# Altium PCB PCB1AMP.CIR.PcbDoc
Units mil, origin at the board's own origin, x right, y up, seen from the top; angles counter-clockwise.
Board outline 5315 x 1720 mil, 2 copper layers (Top Layer, Bottom Layer); 6 components, 4 nets, 14 pads, 0 vias.
Unrouted connection lines stored in the file: 9.
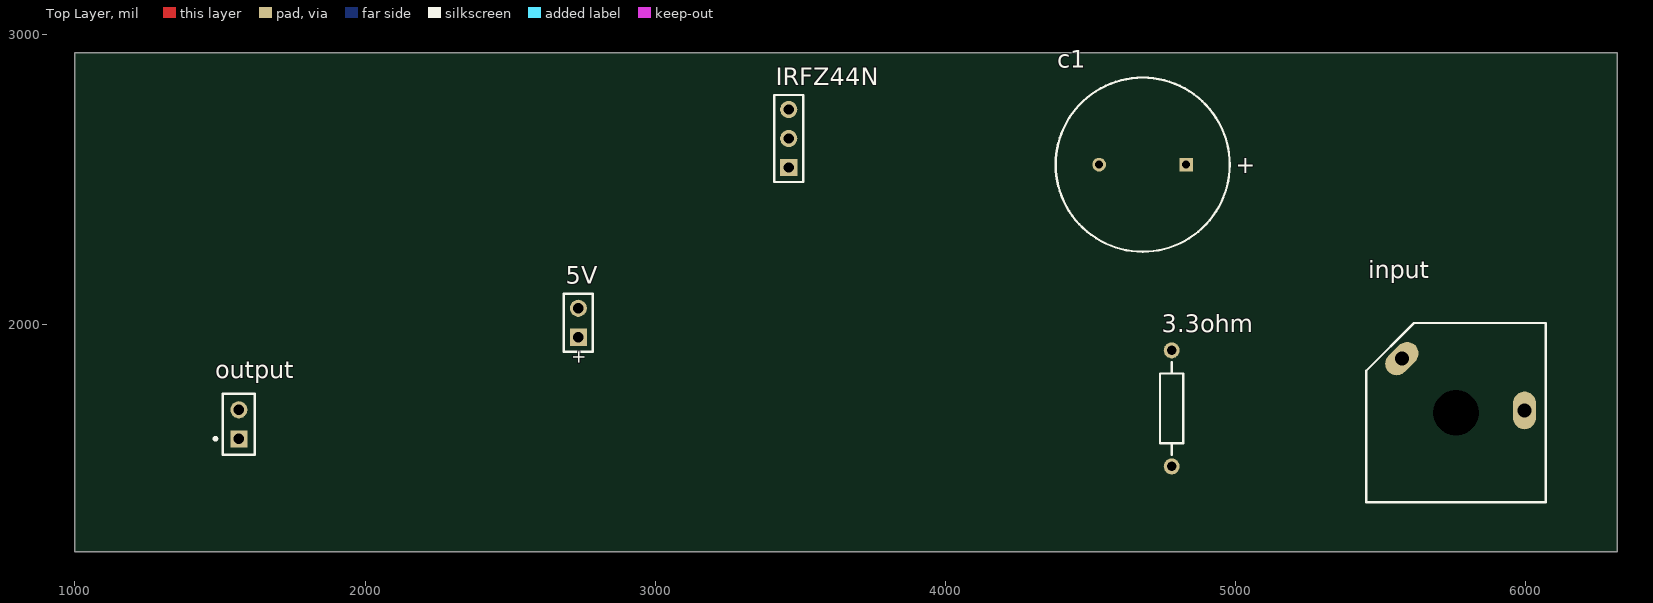
[diagram p0: Top Layer view]
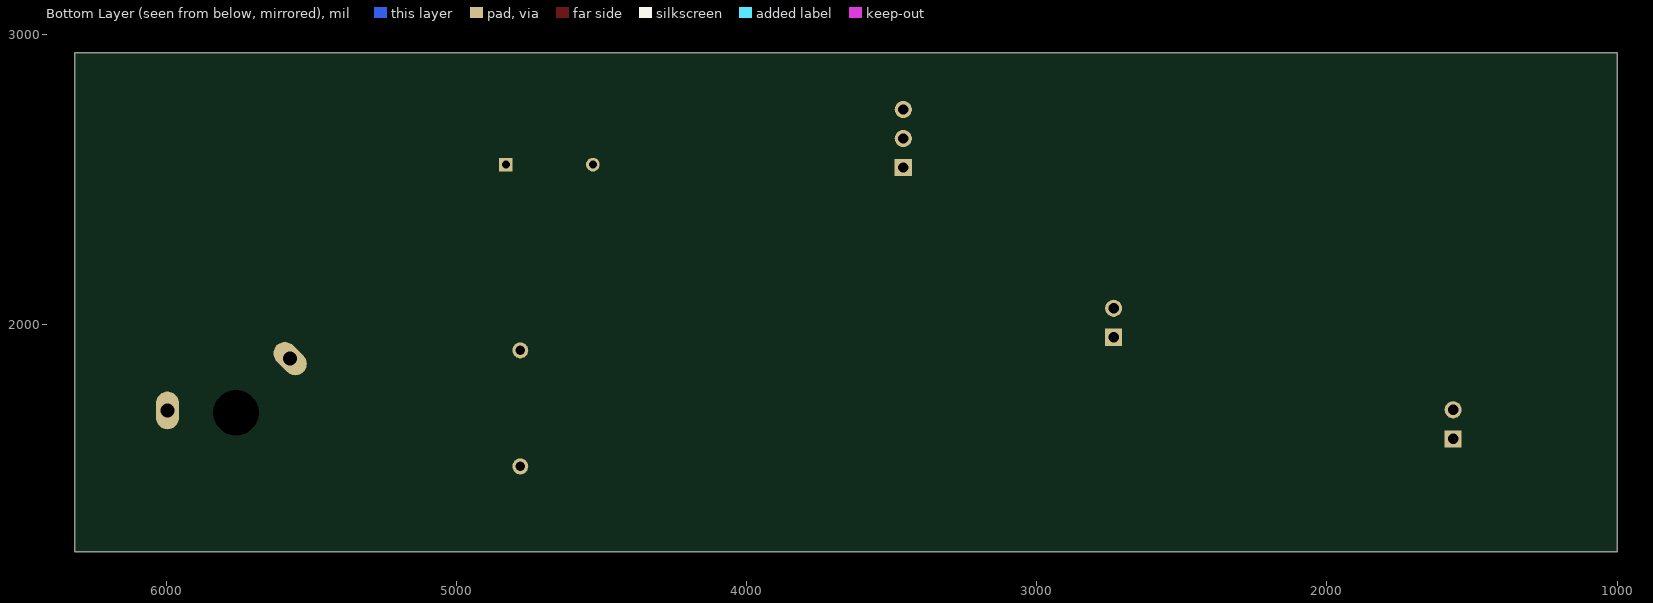
[diagram p1: Bottom Layer view, seen from below]

## Layer stack, top to bottom
Top Solder: solder mask 0.4, Solder Resist, Dk 3.5
Top Layer: signal copper 1.4
Dielectric 1: dielectric 12.6, FR-4, Dk 4.8
Bottom Layer: signal copper 1.4
Bottom Solder: solder mask 0.4, Solder Resist, Dk 3.5

## Board outline
1000,1215 6315,1215 6315,2935 1000,2935

## Design rules (kind name [scope] priority, off if disabled: settings)
Clearance [All] p1: gap=10 ignorepadtopadclearanceinfootprint=FALSE except(0: Arc-Hole Track-Hole SMDPad-Hole THPad-Hole Via-Hole Fill-Hole Poly-Hole Region-Hole Text-Hole)
PolygonConnect [All] p1: connectstyle=Relief reliefconductorwidth=10 reliefentries=4 polygonreliefangle="90 Angle" airgapwidth=10
RoutingVias [All] p1: holewidth=28 width=50 viastyle="Through Hole" minholewidth=28 minwidth=50 maxholewidth=28 maxwidth=50
SolderMaskExpansion [All] p1: expansion=4 istentingtop=FALSE
Width [All] p1: maxlimit=10 minlimit=10 preferedwidth=10
30 further rules are at their usual default settings.

## Components (designator, comment, footprint, x,y, rotation, side; value= is the part's Value field where it differs from the comment)
3.3ohm "Res1" AXIAL-0.4 4780,1710 r90 top
5V "Battery" BAT-2 2735,2005 r90 top
c1 "Cap Pol1" RB7.6-15 4680,2550 r0 top value=22mf/25v
input "Phonejack2" JACK/6-V2 5760,1695 r0 top
IRFZ44N "Header 3" HDR1X3 3460,2540 r90 top
output "Speaker" PIN2 1565,1605 r90 top

## Footprints (in the part's own frame and the unit in brackets; to place one, negate y for a bottom-side part, rotate by r counter-clockwise, add the part's x,y. Pads: shape width x height; smd on the part's side, far side on the other; paste and mask are expansions set on the pad)
AXIAL-0.4 [mm] "Axial Device, Thru-Hole; 2 Leads; 0.4 in Pin Spacing"
  round 1.4 hole 0.85: 1(-5.08,0) 2(5.08,0)
  silkscreen extent -4.06,-1.02 4.06,1.02
BAT-2 [mm] "Battery; 2 Leads"
  rect 1.5x1.5 hole 0.9: 1(-1.27,0)
  round 1.5 hole 0.9: 2(1.27,0)
  silkscreen extent -2.54,-1.27 2.54,1.27
HDR1X3 [mm] "Connector; Header; 3 Position"
  rect 1.5x1.5 hole 0.9: 1(0,0)
  round 1.5 hole 0.9: 2(2.54,0) 3(5.08,0)
  silkscreen extent -1.27,-1.27 6.35,1.27
JACK/6-V2 [mm] "Connector; Jack Socket, 1/4\" [6.5mm], Thru-Hole, 2 Position, Vertical, Body 15.7 x 15.7 x 31 mm (WxTxH)"
  oval 2x3.3 hole 1.2: 1(6,0.2)
  oval 2x3.3 hole 1.2 rot 135: 5(-4.738,4.738)
  round 3.7 hole 4: MH1(0,0)
  silkscreen extent -7.85,-7.85 7.85,7.85
PIN2 [mm] "Photosensitive Diode; 2 Leads"
  rect 1.5x1.5 hole 0.9: 1(0,0)
  round 1.5 hole 0.9: 2(2.54,0)
  silkscreen extent -1.4,-1.4 3.94,2.17
RB7.6-15 [mm] "Polarized Capacitor (Radial); 2 Leads"
  rect 1.2x1.2 hole 0.7: 1(3.81,0)
  round 1.2 hole 0.7: 2(-3.81,0)
  silkscreen extent -7.62,-7.62 7.62,7.62

## Part data
3.3ohm: library part Res2, "Resistor", LatestRevisionDate=17-Jul-2002, LatestRevisionNote="Re-released for DXP Platform.", PackageDescription="Axial Device, Thru-Hole; 2 Leads; 0.4 in Pin Spacing", PackageReference=AXIAL-0.4, Published=8-Jun-2000, Publisher="Altium Limited"
5V: "Multicell Battery", LatestRevisionDate=17-Jul-2002, LatestRevisionNote="Re-released for DXP Platform.", PackageDescription="Battery; 2 Leads", PackageReference=BAT-2, Published=24-Mar-1999, Publisher="Altium Limited"
c1: "Polarized Capacitor (Radial)", LatestRevisionDate=17-Jul-2002, LatestRevisionNote="Re-released for DXP Platform.", PackageDescription="Polarized Capacitor (Radial); 2 Leads", PackageReference=RB7.6-15, Published=8-Jun-2000, Publisher="Altium Limited"
input: "Jack Socket, 1/4\" [6.5mm], Thru-Hole, Vertical, 2-Conductor Open Circuit", PackageDocument=2003, ComponentLink1Description="Manufacturer Link", ComponentLink1URL=http://www.cliffuk.co.uk/, DatasheetDocument=2003, DrillAndSlotSize="Corresponds to nominal value.", LatestRevisionDate=15-Jul-2004, LatestRevisionNote="Component Replaced.", PackageReference=S1VS_SNS, PCB_Layout="Complies with manufacturer's recommendation.", Publisher="Altium Limited"
IRFZ44N: "Header, 3-Pin", LatestRevisionDate=17-Jul-2002, LatestRevisionNote="Re-released for DXP Platform.", Publisher="Altium Limited"
output: "Loudspeaker", LatestRevisionDate=17-Jul-2002, LatestRevisionNote="Re-released for DXP Platform.", PackageReference=PIN2, Published=24-Mar-1999, Publisher="Altium Limited"

## Nets (pads, with @x,y where several pads share a name; then routed paths per layer and width w, separated by ;. In a path a pad name is that pad's centre, name@x,y a point inside that pad or via, vN(x,y) a via of type N, cw(c..) or ccw(c..) an arc to the next point about the centre after c; other vN are vias at no path point)
5v: 5V.2 input.5 IRFZ44N.3
25v: 3.3ohm.2 c1.1 c1.2 input.1 IRFZ44N.1
GND: 3.3ohm.1 IRFZ44N.2 output.2
Net5V_1: 5V.1 output.1
pads on no net: input.MH1

## Dimensions
845,2935 to 825,1205 on Multi-Layer
1007.54,2955 to 6312.54,2990 on Multi-Layer

## Text inside footprints (layer, text, board x,y; h text height)
5V: Top Overlay "+" at 2757.72,1860.51 h45.28 r90
c1: Top Overlay "+" at 5000.15,2520.99 h59.06
input: Mechanical 1 "Mech 2 - Clearance, move to internal plane if present" at 5448.98,2016.26 h11.81; Mechanical 1 "Mech 1 - Slot cut-out" at 5448.98,2035.94 h11.81; Mechanical 1 "Assign keep-out area to slot" at 5448.98,2095 h11.81; Mechanical 1 "Slot 1.2x2.5mm, PTH" at 5448.98,2055.63 h11.81; Mechanical 1 "Alert PCB fab to slot details" at 5448.98,2075.31 h11.81